# Altium PCB WRIP(1).PcbDoc
Units mm, origin at the board's own origin, x right, y up, seen from the top; angles counter-clockwise.
Board outline 7 x 25.54 mm, 2 copper layers (F.Cu, B.Cu); 22 components, 20 nets, 78 pads, 11 vias.
Unrouted connection lines stored in the file: 2.
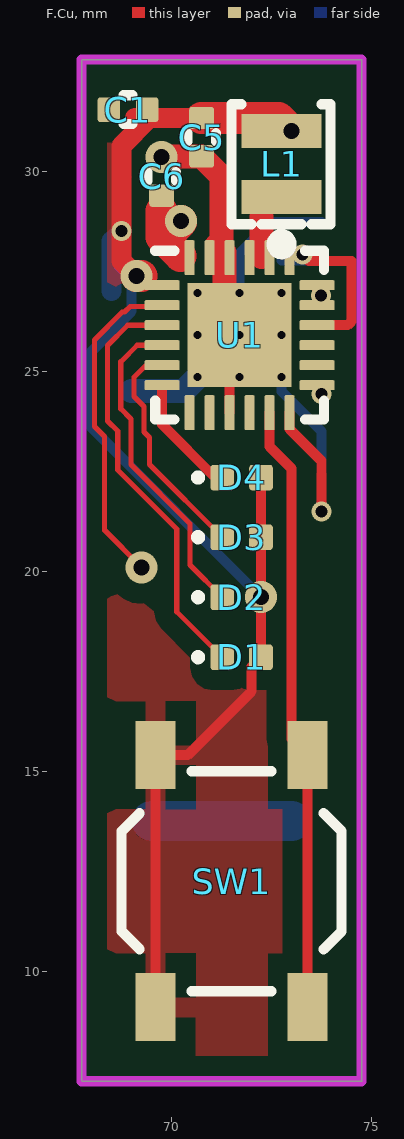
[diagram p0: F.Cu view]
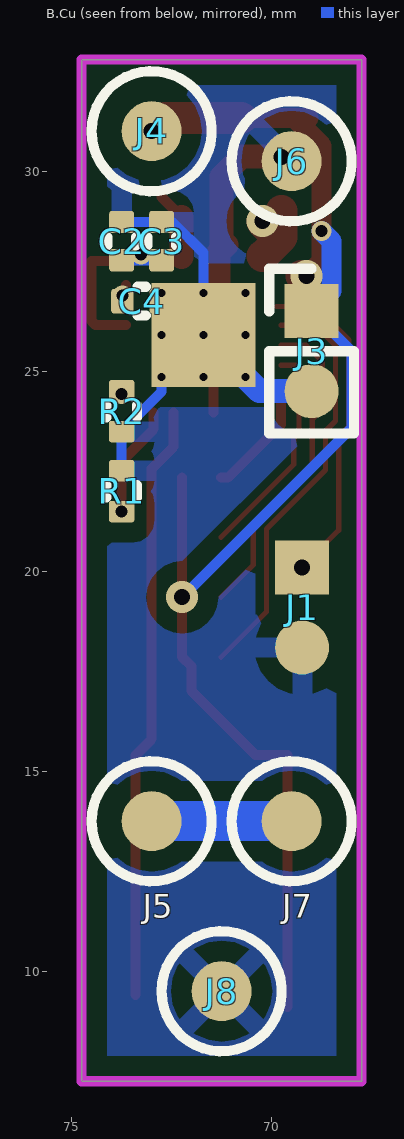
[diagram p1: B.Cu view, seen from below]

## Layer stack, top to bottom
F.Mask: solder mask 0.0102, Solder Resist, Dk 3.5
F.Cu: signal copper 0.0356
Dielectric 1: dielectric 0.32, FR-4, Dk 4.8
B.Cu: signal copper 0.0356
B.Mask: solder mask 0.0102, Solder Resist, Dk 3.5

## Board outline
67.75,32.789 67.75,7.25 74.75,7.25 74.75,32.789 67.75,32.789

## Design rules (kind name [scope] priority, off if disabled: settings)
Clearance "Clearence 0.5_Polygon" [InNamedPolygon('F.Cu-/vbat') OR InNamedPolygon('B.Cu-GND')] p1: gap=0.5 ignorepadtopadclearanceinfootprint=FALSE
MinimumSolderMaskSliver [All] p1: minsoldermaskwidth=0
PolygonConnect Polygon_B.Cu-GND_ConnectDirect [IsNamedPolygon('B.Cu-GND') vs IsVia] p1: connectstyle=Direct reliefconductorwidth=0.254 reliefentries=4 polygonreliefangle="90 Angle" airgapwidth=0.254
PolygonConnect Polygon_B.Cu-GND_ConnectRelief45 [IsNamedPolygon('B.Cu-GND') vs (IsThruPin or IsSMTPin) and (PadShape_AllLayers = 'Round')] p2: connectstyle=Relief reliefconductorwidth=0.5 reliefentries=4 polygonreliefangle="45 Angle" airgapwidth=0.5
PolygonConnect Polygon_B.Cu-GND_ConnectRelief90 [IsNamedPolygon('B.Cu-GND') vs (IsThruPin or IsSMTPin) and (PadShape_AllLayers <> 'Round')] p3: connectstyle=Relief reliefconductorwidth=0.5 reliefentries=4 polygonreliefangle="90 Angle" airgapwidth=0.5
PolygonConnect Polygon_F.Cu-/vbat_ConnectDirect [IsNamedPolygon('F.Cu-/vbat') vs IsVia] p4: connectstyle=Direct reliefconductorwidth=0.254 reliefentries=4 polygonreliefangle="90 Angle" airgapwidth=0.254
PolygonConnect Polygon_F.Cu-/vbat_ConnectRelief45 [IsNamedPolygon('F.Cu-/vbat') vs (IsThruPin or IsSMTPin) and (PadShape_AllLayers = 'Round')] p5: connectstyle=Relief reliefconductorwidth=0.5 reliefentries=4 polygonreliefangle="45 Angle" airgapwidth=0.5
PolygonConnect Polygon_F.Cu-/vbat_ConnectRelief90 [IsNamedPolygon('F.Cu-/vbat') vs (IsThruPin or IsSMTPin) and (PadShape_AllLayers <> 'Round')] p6: connectstyle=Relief reliefconductorwidth=0.5 reliefentries=4 polygonreliefangle="90 Angle" airgapwidth=0.5
RoutingVias [All] p1: holewidth=0.711 width=1.27 viastyle="Through Hole" minholewidth=0.711 minwidth=1.27 maxholewidth=0.711 maxwidth=1.27
SilkToSilkClearance [All] p1: silktosilkclearance=0
SilkToSolderMaskClearance [IsPad] p1: minsilkscreentomaskgap=0 clearancetoexposedcopper=TRUE
SolderMaskExpansion [All] p1: expansion=0.102 istentingtop=FALSE
Width [All] p1: maxlimit=10 minlimit=0.254 preferedwidth=0.254 minimp=50.000000 maximp=50.000000 favimp=50.000000
27 further rules are at their usual default settings.

## Components (designator, comment, footprint, x,y, rotation, side; value= is the part's Value field where it differs from the comment)
C1 "10uf" C_0402_1005Metric#1 68.908,31.538 r180 top
C2 "22uf" C_0402_1005Metric#2 73.75,28.25 r270 bottom
C3 "22uf" C_0402_1005Metric#2 72.75,28.25 r270 bottom
C4 "1uf" C_0402_1005Metric#2 73.25,26.75 r0 bottom
C5 "10uf" C_0402_1005Metric#1 70.75,30.85 r90 top
C6 "1uf" C_0402_1005Metric#1 69.75,29.87 r90 top
D1 "LED" LED_0402_1005Metric 71.75,17.85 r0 top
D2 "LED" LED_0402_1005Metric 71.75,19.35 r0 top
D3 "LED" LED_0402_1005Metric 71.75,20.85 r0 top
D4 "LED" LED_0402_1005Metric 71.75,22.34 r0 top
J1 "Conn_01x02_Pin" PinHeader_1x02_P2.00mm_Vertical 69.24,20.092 r0 bottom
J3 "Conn_01x02_Pin" PinHeader_1x02_P2.00mm_Vertical 69,26.5 r0 bottom
J4 "Conn_01x01_Pin" Pin_D1.0mm_L10.0mm_LooseFit#1 73,31 r0 bottom
J5 "Conn_01x01_Pin" Pin_D1.0mm_L10.0mm_LooseFit#1 73,13.75 r0 bottom
J6 "Conn_01x01_Pin" Pin_D1.0mm_L10.0mm_LooseFit#2 69.5,30.25 r0 bottom
J7 "Conn_01x01_Pin" Pin_D1.0mm_L10.0mm_LooseFit#1 69.5,13.75 r0 bottom
J8 "Conn_01x01_Pin" Pin_D1.0mm_L10.0mm_LooseFit#1 71.25,9.5 r0 bottom
L1 "1uh" Inductor_SMD_SUNLORD_WPN252012H 72.75,30.175 r90 top
R1 "100K" R_0402_1005Metric 73.75,22 r90 bottom
R2 "100K" R_0402_1005Metric 73.75,24 r90 bottom
SW1 "SW_Push" SW_SPST_TL3342 71.5,12.25 r90 top
U1 "~" WQFN-24-1EP_4x4mm_P0.5mm_EP2.6x2.6mm_ThermalVias 71.7,25.9 r0 top

## Footprints (in the part's own frame and the unit in brackets; to place one, negate y for a bottom-side part, rotate by r counter-clockwise, add the part's x,y. Pads: shape width x height; smd on the part's side, far side on the other; paste and mask are expansions set on the pad)
C_0402_1005Metric#1 [mm]
  rrect25% 0.56x0.62 smd mask+0: 1(-0.48,0) 2(0.48,0)
  silkscreen extent -0.11,-0.36 0.11,0.36
C_0402_1005Metric#2 [mm]
  rrect25% 0.56x0.62 smd mask+0: 1(0.48,0) 2(-0.48,0)
  silkscreen extent -0.11,-0.36 0.11,0.36
Inductor_SMD_SUNLORD_WPN252012H [mm]
  rect 0.85x2 smd mask+0: 1(-0.825,0) 2(0.825,0)
  silkscreen extent -2.25,-1.22 1.5,1.25
LED_0402_1005Metric [mm]
  rrect25% 0.59x0.64 smd mask+0: 1(-0.485,0) 2(0.485,0)
  silkscreen extent -1.14,-0.05 -1.04,0.05
Pin_D1.0mm_L10.0mm_LooseFit#1 [mm]
  round 1.5 smd mask+0: 1(0,0)
  silkscreen extent -1.5,-1.5 1.5,1.5
Pin_D1.0mm_L10.0mm_LooseFit#2 [mm]
  round 1.5 smd mask-1.5: 1(0,0)
  silkscreen extent -1.5,-1.5 1.5,1.5
PinHeader_1x02_P2.00mm_Vertical [mm]
  rect 1.35x1.35 smd mask+0: 1(0,0)
  rrect100% 1.35x1.35 smd mask+0: 2(0,2)
R_0402_1005Metric [mm]
  rrect25% 0.54x0.64 smd mask+0: 1(0.51,0) 2(-0.51,0)
  silkscreen extent -0.15,-0.38 0.15,0.38
SW_SPST_TL3342 [mm]
  rect 1.7x1 smd mask+0: 1(-3.15,1.9) 1(3.15,1.9) 2(-3.15,-1.9) 2(3.15,-1.9)
  silkscreen extent -2.75,-2.75 2.75,2.75
WQFN-24-1EP_4x4mm_P0.5mm_EP2.6x2.6mm_ThermalVias [mm]
  rrect25% 0.875x0.25 smd mask+0: 1(-1.937,1.25) 2(-1.937,0.75) 3(-1.937,0.25) 4(-1.937,-0.25) 5(-1.937,-0.75) 6(-1.937,-1.25) 13(1.937,-1.25) 14(1.937,-0.75) 15(1.937,-0.25) 16(1.937,0.25) 17(1.937,0.75) 18(1.937,1.25)
  rrect25% 0.25x0.875 smd mask+0: 7(-1.25,-1.937) 8(-0.75,-1.937) 9(-0.25,-1.937) 10(0.25,-1.937) 11(0.75,-1.937) 12(1.25,-1.937) 19(1.25,1.937) 20(0.75,1.937) 21(0.25,1.937) 22(-0.25,1.937) 23(-0.75,1.937) 24(-1.25,1.937)
  round 0.5 hole 0.2 paste-2539.97 mask-0.5: 25(-1.05,-1.05) 25(-1.05,0) 25(-1.05,1.05) 25(0,-1.05) 25(0,0) 25(0,1.05) 25(1.05,-1.05) 25(1.05,0) 25(1.05,1.05)
  rect 2.6x2.6 smd paste-2.6 mask+0: 25(0,0)
  rect 2.6x2.6 smd far side paste-2.6 mask-2.6: 25(0,0)
  rrect22% 1.13x1.13 on Top Paste mask-1.13: Un1(-0.65,0.65) Un2(-0.65,-0.65) Un3(0.65,0.65) Un4(0.65,-0.65)
  silkscreen extent -2.11,-2.11 2.11,2.11

## Part data
C1 C2 C3 C4 C5 C6: library part C_0402_1005Metric, "Capacitor SMD 0402 (1005 Metric), square (rectangular) end terminal, IPC_7351 nominal, (Body size source: IPC-SM-782 page 76, https://www.pcb-3d.com/wordpress/wp-content/uploads/ipc-sm-782a_amendment_1_and_2.pdf), generated with kicad-footprint-generator", Sheetfile=WRIP.kicad_sch, ki_description="Unpolarized capacitor", ki_keywords="cap capacitor"
D1 D2 D3 D4: library part LED_0402_1005Metric, "LED SMD 0402 (1005 Metric), square (rectangular) end terminal, IPC_7351 nominal, (Body size source: http://www.tortai-tech.com/upload/download/2011102023233369053.pdf), generated with kicad-footprint-generator", Sheetfile=WRIP.kicad_sch, ki_description="Light emitting diode", ki_keywords="LED diode"
J1 J3: library part PinHeader_1x02_P2.00mm_Vertical, "Through hole straight pin header, 1x02, 2.00mm pitch, single row", Sheetfile=WRIP.kicad_sch, ki_description="Generic connector, single row, 01x02, script generated", ki_keywords=connector
J4 J5 J6 J7 J8: library part Pin_D1.0mm_L10.0mm_LooseFit, "solder Pin_ diameter 1.0mm, hole diameter 1.2mm (loose fit), length 10.0mm", Sheetfile=WRIP.kicad_sch, ki_description="Generic connector, single row, 01x01, script generated", ki_keywords=connector
L1: library part Inductor_SMD_SUNLORD_WPN252012H, "INDUCTOR", Sheetfile=WRIP.kicad_sch, ki_description=Inductor, ki_keywords="inductor choke coil reactor magnetic"
R1 R2: library part R_0402_1005Metric, "Resistor SMD 0402 (1005 Metric), square (rectangular) end terminal, IPC_7351 nominal, (Body size source: IPC-SM-782 page 72, https://www.pcb-3d.com/wordpress/wp-content/uploads/ipc-sm-782a_amendment_1_and_2.pdf), generated with kicad-footprint-generator", Sheetfile=WRIP.kicad_sch, ki_description=Resistor, ki_keywords="R res resistor"
SW1: library part SW_SPST_TL3342, "Low-profile SMD Tactile Switch, https://www.e-switch.com/system/asset/product_line/data_sheet/165/TL3342.pdf", Sheetfile=WRIP.kicad_sch, ki_description="Push button switch, generic, two pins", ki_keywords="switch normally-open pushbutton push-button"
U1: library part WQFN-24-1EP_4x4mm_P0.5mm_EP2.6x2.6mm_ThermalVias, "WQFN, 24 Pin (http://www.ti.com/lit/ds/symlink/lm26480.pdf#page=39), generated with kicad-footprint-generator ipc_noLead_generator.py", Sheetfile=WRIP.kicad_sch

## Via types
v1: diameter 0.8, hole 0.4, F.Cu to B.Cu, tented both sides, 6 vias
v2: diameter 0.5, hole 0.3, F.Cu to B.Cu, tented both sides, 5 vias

## Nets (pads, with @x,y where several pads share a name; then routed paths per layer and width w, separated by ;. In a path a pad name is that pad's centre, name@x,y a point inside that pad or via, vN(x,y) a via of type N, cw(c..) or ccw(c..) an arc to the next point about the centre after c; other vN are vias at no path point)
5v: C4.1 U1.17 U1.18 | length 0.7
  F.Cu w0.25: U1.17 U1.18
  B.Cu w0.25: C4.1 C4.1@73.73,26.98
  other v2: 73.73,26.89
coil: J5.1 J7.1 | length 3.5
  B.Cu w1: J7.1 J5.1
GND: C1.2 C2.2 C3.2 C4.2 C5.1 C6.2 J1.2 J3.2 J6.1 J8.1 R1.1 R2.2 U1.9 U1.22 U1.23 U1.25 | length 15.2
  F.Cu w0.25: U1.9 U1.25@71.45,25.65
  F.Cu w0.6: v1(69.75,30.35) 69.77,30.37 C5.1 71.25,29.87 71.25,28.038 U1.22@71.325,27.962 ; 71.132,28.155 U1.22@71.325,27.962 ; U1.25@71.325,26.275 U1.22@71.325,27.962
  B.Cu w0.25: U1.25@71.7,26.95 71.7,27.95 72.48,28.73 C3.2 C2.2 ; U1.25@72.75,24.85 72.75,24.49 R2.2 R1.1
  B.Cu w0.6: J3.2 70.3,24.5 U1.25@70.65,24.85
Net-(D1-K): D1.1 U1.3 | length 10.6
  F.Cu w0.13: U1.3 68.904,26.15 68.4,25.646 68.4,23.756 68.652,23.503 68.653,22.529 70.13,21.052 70.13,18.985 D1.1
Net-(D2-K): D2.1 U1.4 | length 8.1
  F.Cu w0.13: U1.4 69.141,25.65 68.73,25.239 68.73,24.061 68.983,23.809 68.983,22.666 70.46,21.189 70.46,20.155 D2.1
Net-(D3-K): D3.1 U1.5 | length 5.7
  F.Cu w0.13: U1.5 69.362,25.15 69.06,24.848 69.06,24.367 69.313,24.114 69.313,23.478 69.45,23.341 69.45,22.665 D3.1
Net-(D4-K): D4.1 U1.6 | length 3
  F.Cu w0.25: U1.6 69.762,23.664 71.087,22.34 D4.1
Net-(J1-Pin_1): J1.1 U1.2 | length 8.3
  F.Cu w0.13: v1(69.24,20.092) 69.24,20.108 68.322,21.026 68.322,23.366 68.07,23.619 68.07,25.783 68.767,26.48 68.824,26.48 68.965,26.62 U1.2@69.875,26.62
Net-(L1-Pad1): L1.1 U1.20 U1.21 | length 1.7
  F.Cu w0.25: 72.25,28.85 L1.1
  F.Cu w0.6: 72.25,27.85 72.25,28.85
Net-(U1-BUTTON): SW1.2 U1.11 | length 15
  F.Cu w0.25: U1.11 72.45,23.113 73,22.563 73,15.8 73.4,15.4 SW1.2@73.4,9.4
Net-(U1-SWIN2): C2.1 C3.1 U1.16 U1.19 | length 5.2
  F.Cu w0.25: U1.19@72.975,27.838 72.975,27.862 73.032,27.919 v2(73.269,27.919) 73.438,27.75 74.5,27.75 74.5,26.25 74.4,26.15 U1.16
  B.Cu w0.25: C3.1 v2@73.25,27.77 ; v2(73.269,27.919) 73.25,27.9 v2@73.25,27.77 ; C2.1 v2@73.25,27.77
Net-(U1-TP1): R1.2 U1.12 | length 2.8
  F.Cu w0.25: U1.12 72.95,23.55 73.75,22.75 v2(73.75,21.49)
Net-(U1-TP2): R2.1 U1.13 | length 0.3
  F.Cu w0.25: U1.13 73.638,24.613 73.75,24.5 v2(73.75,24.426)
Net-(U1-VBUS): C6.1 U1.24 | length 2
  F.Cu w0.8: 69.75,29 69.75,28.35 ; 70.225,27.875 69.75,28.35 ; v1(70.232,28.75) 70.232,28.732 69.85,28.35 69.75,28.35
unconnected-(U1-NC-Pad7): U1.7
unconnected-(U1-NC-Pad8): U1.8
unconnected-(U1-NC-Pad14): U1.14
unconnected-(U1-TORCH-Pad10): U1.10
unconnected-(U1-USBOUT2-Pad15): U1.15
vbat: C1.1 C5.2 D1.2 D2.2 D3.2 D4.2 J3.1 J4.1 L1.2 SW1.1 U1.1 | length 35.2
  F.Cu w0.25: SW1.1@69.6,9.1 69.6,15.4 70.4,15.4 72,17 72,17.615 D1.2 D4.2
  F.Cu w0.5: 69.08,31.33 C5.2 ; v1(69.125,27.375) 68.749,27.751 68.749,30.636 C1.1@69.444,31.33
  F.Cu w0.8: v1(69.125,27.375) v1@69.25,27.375 ; C5.2 72.67,31.33 v1(73,31)
  B.Cu w0.25: v1(69.125,27.375) 69,27.25 J3.1 68,25.5 68,23.585 v1(72.235,19.35)
  B.Cu w0.5: J3.1@68.5,27 68.5,28.25 v2(68.75,28.5)
pads on no net: U1.Un1 U1.Un2 U1.Un3 U1.Un4

## Polygon pours and split planes (outlines as drawn)
vbat on F.Cu "F.Cu-/vbat" (solid, remove dead copper, pour order 1): 51.25,1 53.75,46.5 107.75,46.5 105,0
GND on B.Cu "B.Cu-GND" (solid, remove dead copper, pour order 2): 60.25,6 61.25,47.5 102.25,38 105.5,4

## Keep-outs
Edge.Cuts:
  lines w0: 67.75,7.25 74.75,7.25 74.75,32.789 67.75,32.789 67.75,7.25
  lines w0.254: 67.75,7.25 74.75,7.25 74.75,32.789 67.75,32.789 67.75,7.25